# Altium PCB K60.PcbDoc
Units mil, origin at the board's own origin, x right, y up, seen from the top; angles counter-clockwise.
Board outline 3937.01 x 2480.32 mil, 2 copper layers (Top Layer, Bottom Layer); 44 components, 74 nets, 316 pads, 27 vias.
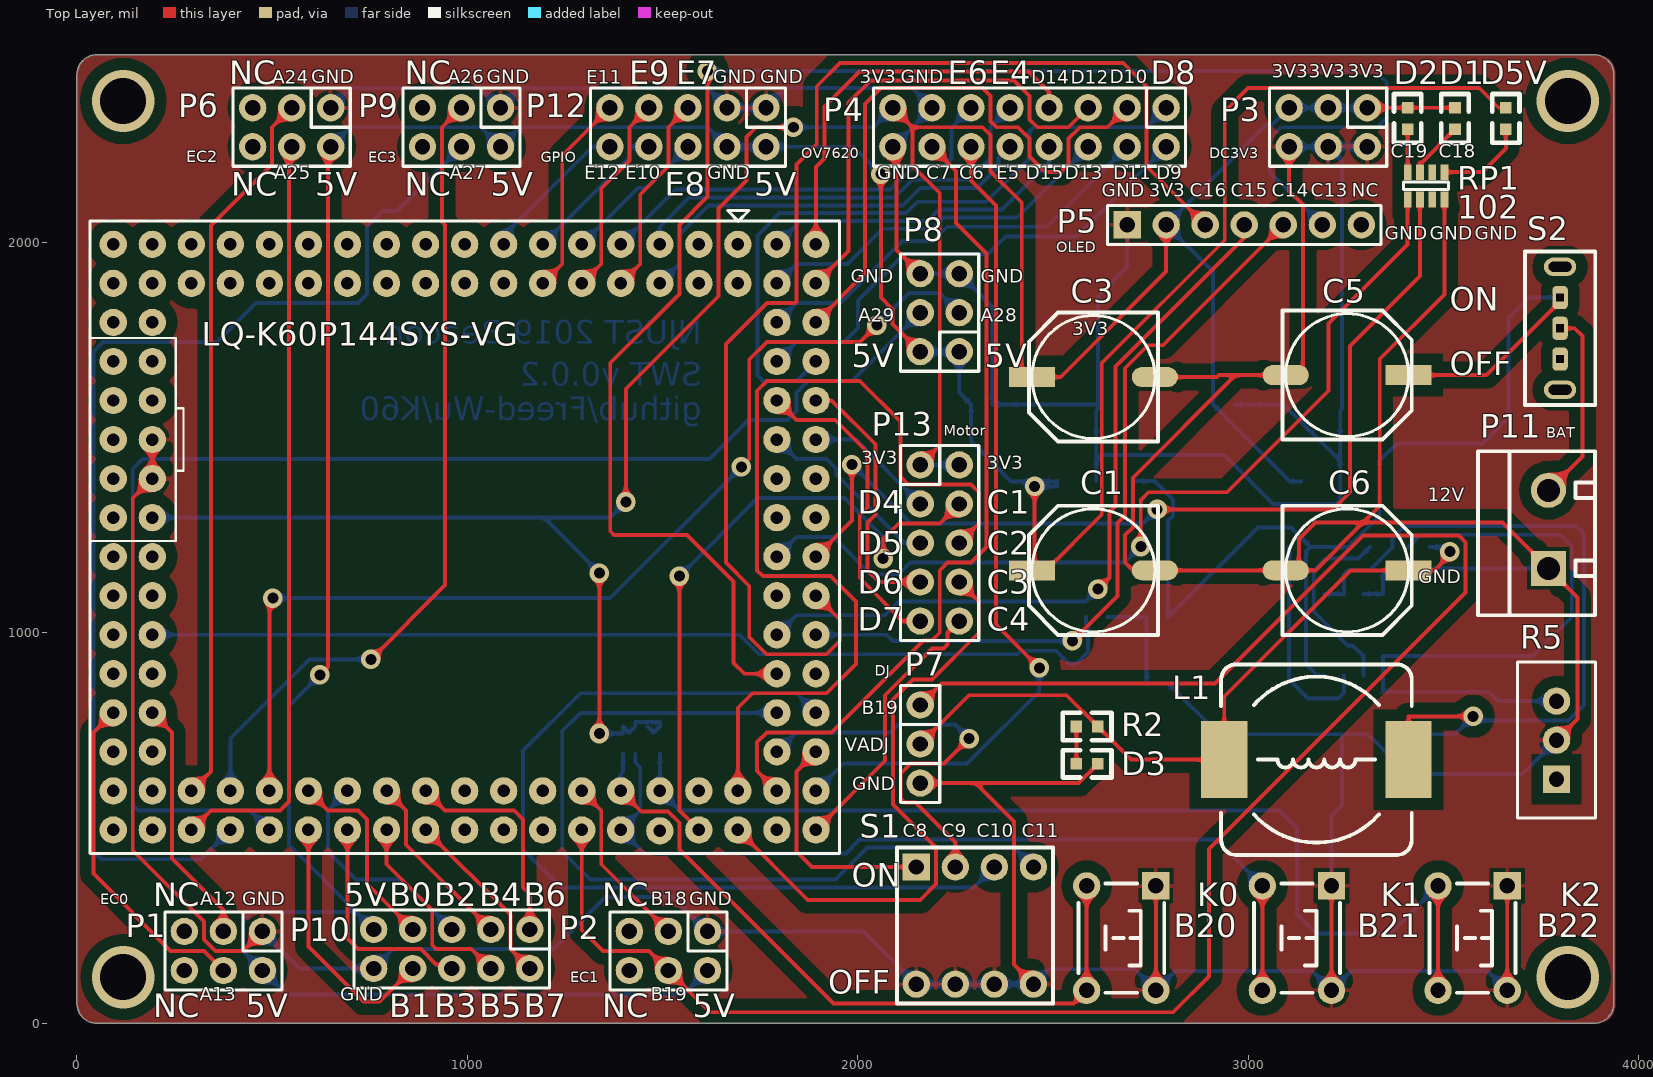
[diagram p0: Top Layer view]
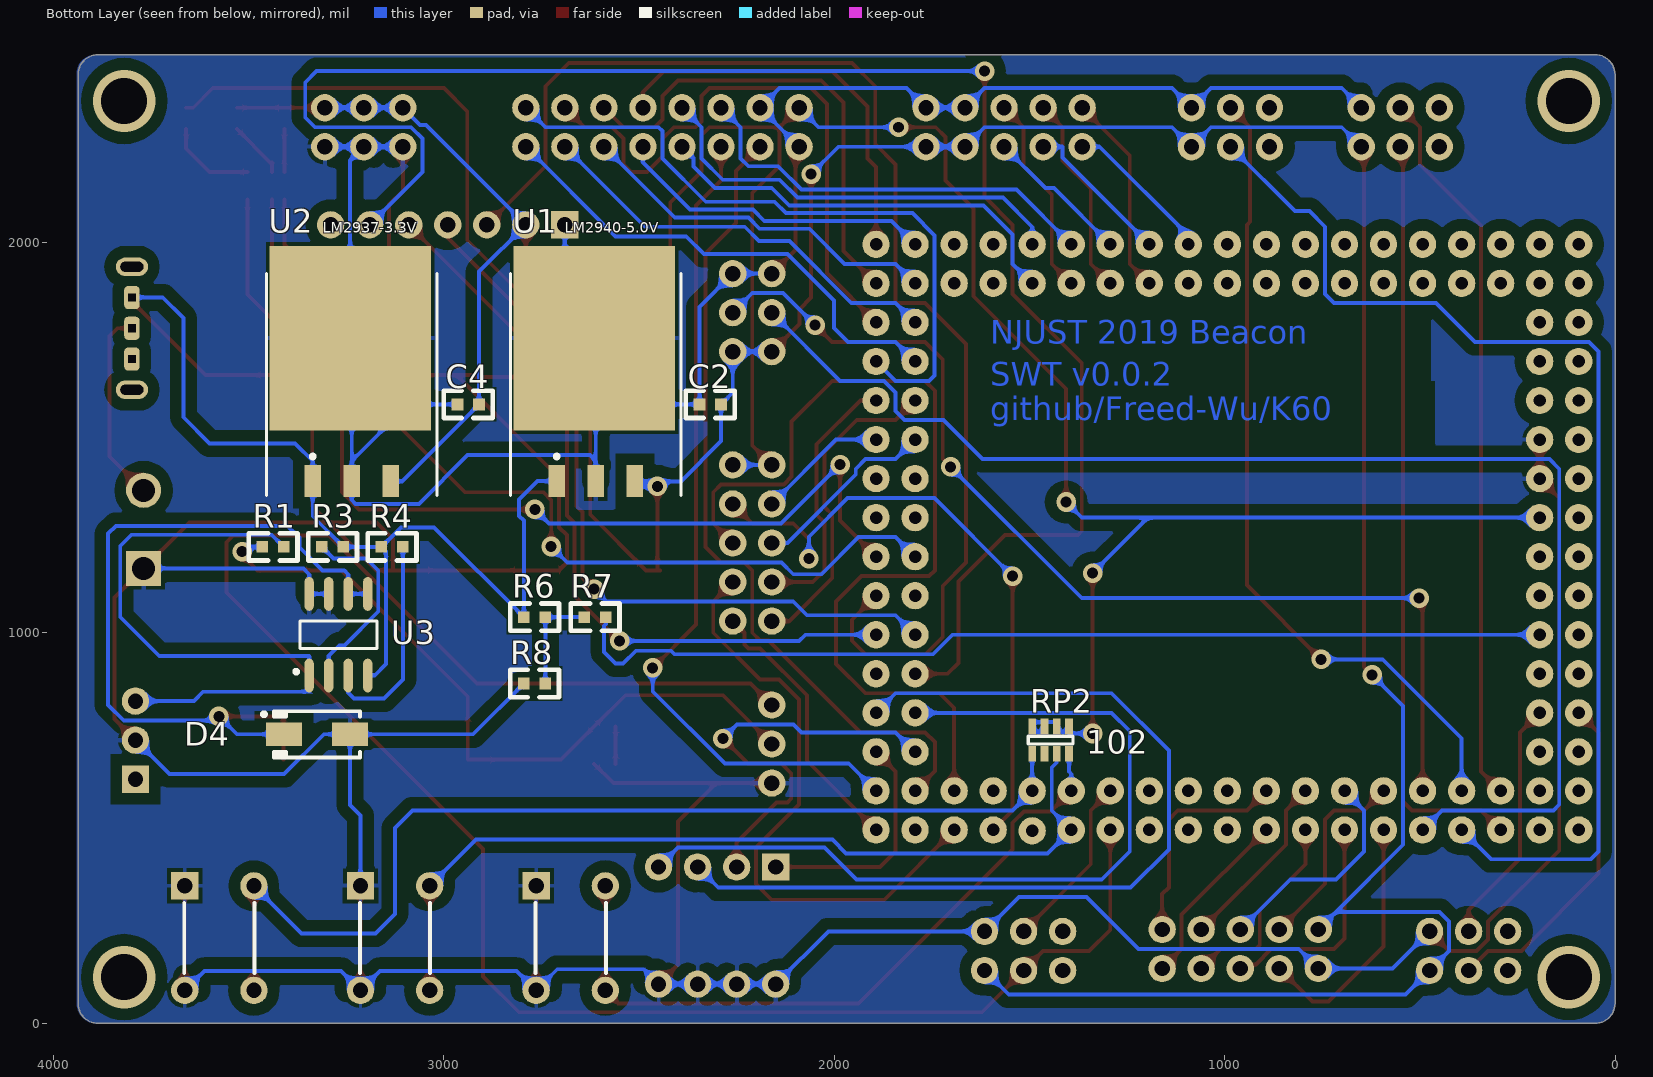
[diagram p1: Bottom Layer view, seen from below]
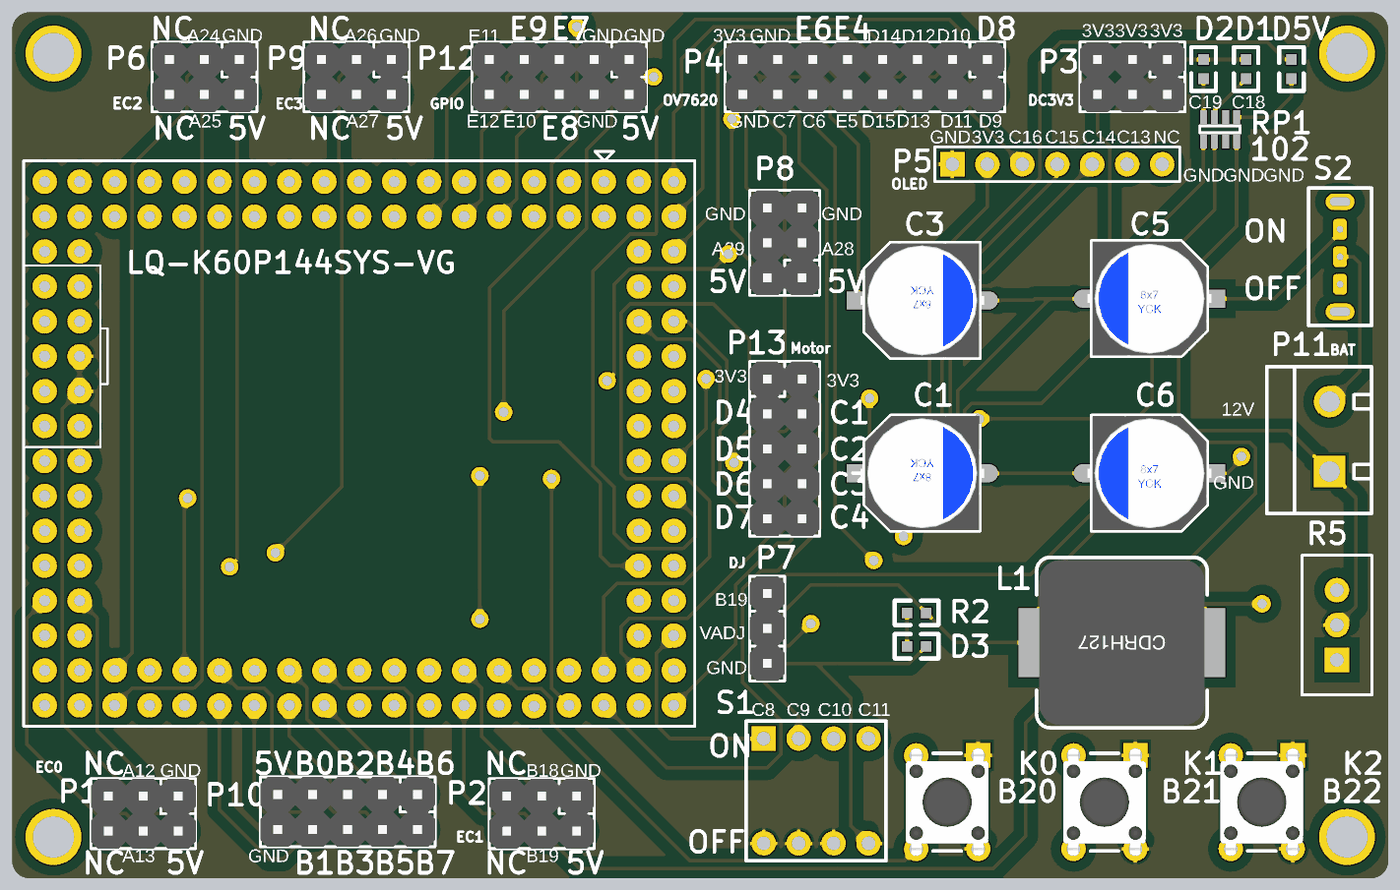
[diagram p2: 3D render of the assembled board from above, using the file's embedded part models]

## Layer stack, top to bottom
Top Solder: solder mask 0.4, Solder Resist, Dk 3.5
Top Layer: signal copper 1.4
Dielectric 1: dielectric 12.6, FR-4, Dk 4.8
Bottom Layer: signal copper 1.4
Bottom Solder: solder mask 0.4, Solder Resist, Dk 3.5

## Board outline
50,0 cw(c50,50) 0,50 0,118.11 0,2362.2 0,2430.31 cw(c50,2430.31) 50,2480.31 3887.01,2480.31 cw(c3887.01,2430.31) 3937.01,2430.31 3937.01,2362.2 3937.01,118.11 3937.01,50 cw(c3887.01,50) 3887.01,0

## Design rules (kind name [scope] priority, off if disabled: settings)
Clearance Clearance_1 [InPolygon] p1: gap=30 ignorepadtopadclearanceinfootprint=FALSE
Clearance [All] p2: gap=10 ignorepadtopadclearanceinfootprint=FALSE except(0: Arc-Hole Track-Hole SMDPad-Hole THPad-Hole Via-Hole Fill-Hole Poly-Hole Region-Hole Text-Hole)
PolygonConnect [All] p1: connectstyle=Relief reliefconductorwidth=10 reliefentries=4 polygonreliefangle="90 Angle" airgapwidth=10
RoutingVias [All] p1: holewidth=28 width=50 viastyle="Through Hole" minholewidth=28 minwidth=50 maxholewidth=28 maxwidth=50
SolderMaskExpansion [All] p1: expansion=4
Width [All] p1: maxlimit=10 minlimit=10 preferedwidth=10
30 further rules are at their usual default settings.

## Components (designator, comment, footprint, x,y, rotation, side; value= is the part's Value field where it differs from the comment)
C1 "Cap Pol1" "CT 8*7 - C" 2603.58,1160 r180 top value=470u/25V
C2 "Cap" 0603 2345,1585 r180 bottom value=104
C3 "Cap Pol1" "CT 8*7 - C" 2603.58,1655 r180 top value=470u/25V
C4 "Cap" 0603 2965,1585 r180 bottom value=104
C5 "Cap Pol1" "CT 8*7 - C" 3253.74,1660 r0 top value=220u
C6 "Cap Pol1" "CT 8*7 - C" 3253.74,1160 r0 top value=470u
D1 "发光二极管" 0603 3530,2345 r270 top
D2 "发光二极管" 0603 3408.5,2345 r270 top
D3 "发光二极管" 0603 2560,664.29 r0 top
D4 "IN5824" SMA 3325,740 r0 bottom
D5V "发光二极管" 0603 3660,2345 r270 top
K0 "B20" "TSW DIP-6*6*6" 2675,217.86 r270 top
K1 "B21" "TSW DIP-6*6*6" 3125,217.86 r270 top
K2 "B22" "TSW DIP-6*6*6" 3575,217.86 r270 top
L1 "Inductor" CDRH127 3175,675 r180 top value=33u
LQ-K60P144SYS-VG "" LQ_KXXP144-SYSVG 1692.91,1995 r180 top locked
P1 "EC0" 2.54排针2X3 475,235 r180 top locked
P2 "EC1" 2.54排针2X3 1615,235 r180 top locked
P3 "DC3V3" 2.54排针2X3 3305,2345 r180 top locked
P4 "OV7620" 2.54排针2X8 2390,2245 r180 top
P5 "OLED" HDR1X7 2690,2045 r0 top
P6 "EC2" 2.54排针2X3 650,2345 r180 top
P7 "DJ" 2.54排针1X3 2160,715 r90 top locked
P8 "ITR" 2.54排针2X3 2260,1720 r90 top
P9 "EC3" 2.54排针2X3 1085,2345 r180 top
P10 "ADC" 2.54排针2X5 1160,240 r180 top
P11 "BAT" KF301-2P 3768.94,1165 r90 top
P12 "GPIO" 2.54排针2X5 1765,2345 r180 top
P13 "Motor" 2.54排针2X5 2160,1430 r270 top
R1 "Res1" 0603 3410,1220 r0 bottom value=1K
R2 "Res1" 0603 2560,760 r0 top value=3K3
R3 "Res1" 0603 3257.5,1220 r0 bottom value=1K
R4 "Res1" 0603 3160,1220 r180 bottom value=2K7
R5 "Res Tap" VR_A1 3790,725 r90 top value=2K
R6 "Res1" 0603 2740,1040 r0 bottom value=2K
R7 "Res1" 0603 2585,1040 r0 bottom value=2K
R8 "Res1" 0603 2795,870 r180 bottom value=1K
RP1 "102" 8P4R_0603 3502.99,2180 r270 top
RP2 "102" 8P4R_0603 1492.99,690 r90 bottom
S1 "SW DIP-4" BMKG4 2300,250 r0 top
S2 "SW-SPDT" SW3-H2X3_8.6X4.5_L 3799.02,1740.63 r270 top
U1 "LM2940-5.0V" TO-263-3 2610.91,1555 r180 bottom
U2 "LM2937-3.3V" TO-263-3 3235.91,1555 r180 bottom
U3 "AS1015" NSO8_N 3270,995 r90 bottom

## Footprints (in the part's own frame and the unit in brackets; to place one, negate y for a bottom-side part, rotate by r counter-clockwise, add the part's x,y. Pads: shape width x height; smd on the part's side, far side on the other; paste and mask are expansions set on the pad)
2.54排针1X3 [mil]
  round 70 hole 39.37: 1(-100,0) 2(0,0) 3(100,0)
  silkscreen extent -150,-50 150,50, body extent -150,-50 150,50, height 98
2.54排针2X3 [mil]
  round 70 hole 39.37: 1(0,0) 2(0,100) 3(100,0) 4(100,100) 5(200,0) 6(200,100)
  silkscreen extent -50,-50 250,150, body extent -50,-50 250,150, height 98
2.54排针2X5 [mil]
  round 70 hole 39.37: 1(0,0) 2(0,100) 3(100,0) 4(100,100) 5(200,0) 6(200,100) 7(300,0) 8(300,100) 9(400,0) 10(400,100)
  silkscreen extent -50,-50 450,150, body extent -50,-50 450,150, height 98
2.54排针2X8 [mil]
  round 70 hole 39.37: 1(-400,-100) 2(-400,0) 3(-300,-100) 4(-300,0) 5(-200,-100) 6(-200,0) 7(-100,-100) 8(-100,0) 9(0,-100) 10(0,0) 11(100,-100) 12(100,0) 13(200,-100) 14(200,0) 15(300,-100) 16(300,0)
  silkscreen extent -450,-150 350,50, body extent -450,-150 350,50, height 98
8P4R_0603 [mm]
  rect 1.016x0.5 smd: 1(0,0) 2(1.778,0) 3(0,-0.8) 4(1.778,-0.8) 5(0,-1.6) 6(1.778,-1.6) 7(0,-2.4) 8(1.778,-2.4)
  silkscreen extent 0.63,-2.67 1.14,0.25, body extent 0,-2.67 1.78,0.25, height 1
0603 [mil]
  rect 30x30 smd: 1(0,0) 2(55,0)
  silkscreen extent -35,-35 90,35
BMKG4 [mil]
  round 70 hole 39.37: 1(-150,-150) 2(-50,-150) 3(50,-150) 4(150,-150) 5(150,150) 6(50,150) 7(-50,150)
  rect 70x70 hole 39.37: 8(-150,150)
  silkscreen extent -200,-200 200,200
CDRH127 [mm]
  rect 3x5 smd: 1(-6,0) 2(6,0)
  silkscreen extent -6.2,-6.2 6.2,6.2, body extent -6,-6 6,6, height 7.8
"CT 8*7 - C" [mm]
  rect 3x1.3 smd: 1(4,0)
  oval 3x1.3 smd: 2(-4,0)
  silkscreen extent -4.2,-4.2 4.2,4.2, body extent -4.5,-4.15 4.5,4.15, height 7
HDR1X7 [mil]
  rect 70x70 hole 39.37: 1(0,0)
  round 70 hole 39.37: 2(100,0) 3(200,0) 4(300,0) 5(400,0) 6(500,0) 7(600,0)
  silkscreen extent -50,-50 650,50
KF301-2P [mil]
  rect 90x90 hole 59.06: 1(0,0)
  round 90 hole 59.06: 2(200,0)
  silkscreen extent -120,-120 300,180, body extent -113,-118 300,181, height 396
LQ_KXXP144-SYSVG [mil]
  round 70 hole 32: 1(0,0) 2(0,100) 3(100,0) 4(100,100) 5(200,0) 6(200,100) 7(300,0) 8(300,100) 9(400,0) 10(400,100) 11(500,0) 12(500,100) 13(600,0) 14(600,100) 15(700,0) 16(700,100) 17(800,0) 18(800,100) 19(900,0) 20(900,100) 21(1000,0) 22(1000,100) 23(1100,0) 24(1100,100) 25(1200,0) 26(1200,100) 27(1300,0) 28(1300,100) 29(1400,0) 30(1400,100) 31(1500,0) 32(1600,0) 33(1500,100) 34(1600,100) 35(1500,200) 36(1600,200) 37(1500,300) 38(1600,300) 39(1500,400) 40(1600,400) 41(1500,500) 42(1600,500) 43(1500,600) 44(1600,600) 45(1500,700) 46(1600,700) 47(1500,800) 48(1600,800) 49(1500,900) 50(1600,900) 51(1500,1000) 52(1600,1000) 53(1500,1100) 54(1600,1100) 55(1500,1200) 56(1600,1200) 57(1500,1300) 58(1600,1300) 59(1500,1400) 60(1600,1400) 61(1500,1500) 62(1600,1500) 63(1400,1500) 64(1400,1400) 65(1300,1500) 66(1300,1400) 67(1200,1500) 68(1200,1400) 69(1100,1500) 70(1100,1400) 71(1000,1500) 72(1000,1400) 73(900,1500) 74(900,1400) 75(800,1500) 76(800,1400) 77(700,1500) 78(700,1400) 79(600,1500) 80(600,1400) 81(500,1500) 82(500,1400) 83(400,1500) 84(400,1400) 85(300,1500) 86(300,1400) 87(200,1502.36) 88(200,1400) 89(100,1500) 90(100,1400) 91(0,1500) 92(0,1400) 93(-100,1500) 94(-200,1500) 95(-100,1400) 96(-200,1400) 97(-100,1300) 98(-200,1300) 99(-100,1200) 100(-200,1200) 101(-100,1100) 102(-200,1100) 103(-100,1000) 104(-200,1000) 105(-100,900) 106(-200,900) 107(-100,800) 108(-200,800) 109(-100,700) 110(-200,700) 111(-100,600) 112(-200,600) 113(-100,500) 114(-200,500) 115(-100,400) 116(-200,400) 117(-100,300) 118(-200,300) 119(-100,200) 120(-200,200) 121(-100,100) 122(-200,100) 123(-100,0) 124(-200,0)
  silkscreen extent -260,-87 1660,1560
NSO8_N [mm]
  oval 2.2x0.6 smd: 1(-2.654,1.905) 2(-2.654,0.635) 3(-2.654,-0.635) 4(-2.654,-1.905) 5(2.654,-1.905) 6(2.654,-0.635) 7(2.654,0.635) 8(2.654,1.905)
  silkscreen extent -2.52,-2.5 0.9,2.88, body extent -1.95,-2.45 1.95,2.45, height 1.75
SMA [mm]
  rect 2.35x1.55 smd: 1(-2.15,0) 2(2.15,0)
  silkscreen extent -2.8,-1.5 3.58,1.5, body extent -2.6,-1.3 2.6,1.3, height 2.64
SW3-H2X3_8.6X4.5_L [mm]
  oval 1.2x2.1 hole 0.65 slot 1.5 at 90 deg: 0(-5,0) 0(3,0)
  rrect50% 1.5x1 hole 0.5 square: 1(-3,0) 2(-1,0) 3(1,0)
  silkscreen extent -6,-2.29 4,2.29, body extent -5.26,-2.23 3.23,2.21, height 8.91
TO-263-3 [mm]
  rect 1.05x2.1 smd: 1(-2.54,-4.225) 2(0,-4.225) 3(2.54,-4.225)
  rect 10.5x12 smd: 4(-0.104,5.08)
  silkscreen extent -5.55,-5.17 5.55,9.28, body extent -5.33,-4.7 5.33,9.27, height 1.6
"TSW DIP-6*6*6" [mm]
  rect 1.778x1.778 hole 1: 1(-3.4,2.25)
  round 1.778 hole 1: 2(-3.4,-2.25) 3(3.4,-2.25) 4(3.4,2.25)
  silkscreen extent -3.56,-2.79 3.56,2.79, body extent -4.11,-3 4.11,3, height 5.95
VR_A1 [mil]
  rect 70x70 hole 39.37: 1(-100,0)
  round 70 hole 39.37: 2(0,0) 3(100,0)
  silkscreen extent -200,-100 200,100, body extent -200,-100 200,100, height 413

## Part data
C1 C3 C5 C6: "Polarized Capacitor (Radial)", LatestRevisionDate=17-Jul-2002, LatestRevisionNote="Re-released for DXP Platform.", PackageDescription="Polarized Capacitor (Radial); 2 Leads", PackageReference=RB7.6-15, Published=8-Jun-2000, Publisher="Altium Limited"
C2 C4: "Capacitor", LatestRevisionDate=17-Jul-2002, LatestRevisionNote="Re-released for DXP Platform.", PackageDescription="Radial Cap, Thru-Hole; 2 Leads; 0.3 in Pin Spacing", PackageReference=RAD-0.3, Published=8-Jun-2000, Publisher="Altium Limited"
D4: library part Diode, "SS54", Code_JEDEC=DO-214-AB, LatestRevisionDate=17-Jul-2002, LatestRevisionNote="Re-released for DXP Platform.", PackageDescription="DO-214-AB/SMC; 2 C-Bend Leads; Body 7.9 x 5.9 mm, inc. leads (LxW)", PackageReference=SMC, PackageVersion=Sep-1996, Published=8-Jun-2000, Publisher="Altium Limited"
K0 K1 K2: library part key
LQ-K60P144SYS-VG: library part LQ_KXXP144-SYSVG
P1 P2 P3 P6 P8 P9: library part "Header 3X2", "Header, 3-Pin, Dual row", LatestRevisionDate=17-Jul-2002, LatestRevisionNote="Re-released for DXP Platform.", Publisher="Altium Limited"
P4: library part "Header 8X2", "Header, 8-Pin, Dual row", LatestRevisionDate=17-Jul-2002, LatestRevisionNote="Re-released for DXP Platform.", Publisher="Altium Limited"
P5: library part "Header 7", "Header, 7-Pin", LatestRevisionDate=17-Jul-2002, LatestRevisionNote="Re-released for DXP Platform.", Publisher="Altium Limited"
P7: library part "Header 3", "Header, 3-Pin", LatestRevisionDate=17-Jul-2002, LatestRevisionNote="Re-released for DXP Platform.", Publisher="Altium Limited"
P10 P12 P13: library part "Header 5X2", "Header, 5-Pin, Dual row", LatestRevisionDate=17-Jul-2002, LatestRevisionNote="Re-released for DXP Platform.", Publisher="Altium Limited"
P11: library part "Header 2", "Header, 2-Pin", LatestRevisionDate=17-Jul-2002, LatestRevisionNote="Re-released for DXP Platform.", Publisher="Altium Limited"
R1 R2 R3 R4 R6 R7 R8: "Resistor", LatestRevisionDate=17-Jul-2002, LatestRevisionNote="Re-released for DXP Platform.", PackageDescription="Axial Device, Thru-Hole; 2 Leads; 0.3 in Pin Spacing", PackageReference=AXIAL-0.3, Published=8-Jun-2000, Publisher="Altium Limited"
R5: "Tapped Resistor", LatestRevisionDate=17-Jul-2002, LatestRevisionNote="Re-released for DXP Platform.", PackageDescription="Variable Resistor, Thru-Hole; 3 Leads", PackageReference=VR3, Published=24-Mar-1999, Publisher="Altium Limited", Set Position=0.5, Sim Note="Enter the Resistance value and the set point into parameter fields."
RP1 RP2: library part "Res Pak-8"
S1: "DIP Switch, 4 Position, SPST", Code_IPC=SOIC127P600-8, Code_JEDEC=MS-012-AA, LatestRevisionDate=29-May-2009, LatestRevisionNote="IPC-7351 Footprint Added.", PackageDescription="8-Pin Small Outline Integrated Circuit 1.27 mm Pitch", PackageReference=SO8, PackageVersion=Dec-2002, Published=24-Mar-1999, Publisher="Altium Limited"
S2: "SPDT Subminiature Toggle Switch, Right Angle Mounting, Vertical Actuation", ComponentLink1Description="Manufacturer Link", ComponentLink1URL=http://www.apem.com, DatasheetVersion=05-Dec-2000, LatestRevisionDate=17-Dec-2003, LatestRevisionNote="Schematic revised, PCB Footprint replaced.", PackageDescription="Switch; 4 Leads", PackageReference=TL36WW15050, Published=24-Mar-1999, Publisher="Altium Limited"
U1 U2: library part LM2940, "5V稳压芯片"
U3: "可调升压芯片"
L1: Code_IEC=1005, Code_JEITA=0402, LatestRevisionDate=29-May-2009, LatestRevisionNote="IPC-7351 Footprint Added.", PackageDescription="Chip Inductor", PackageReference=0402-A, Published=8-Jun-2000, Publisher="Altium Limited"

## Via types
v1: diameter 50, hole 28, Top Layer to Bottom Layer, 23 vias
v2: diameter 160, hole 118.11, Top Layer to Bottom Layer, 4 vias

## Nets (pads, with @x,y where several pads share a name; then routed paths per layer and width w, separated by ;. In a path a pad name is that pad's centre, name@x,y a point inside that pad or via, vN(x,y) a via of type N, cw(c..) or ccw(c..) an arc to the next point about the centre after c; other vN are vias at no path point)
3V3: C3.1 C4.2 D1.1 D2.1 LQ-K60P144SYS-VG.45 P3.1 P3.3 P3.5 P4.15 P5.2 P13.1 P13.2 RP2.2 RP2.4 RP2.6 RP2.8 U2.3 | length 7793.9
  Top Layer w10: v1(1338,742) v1(1338,1153) ; v1(1406,1335) 1406,1625.09 1642.91,1862 1642.91,2086.91 1715,2159 1715,2270 1740,2295 v1(1835,2295) ; P4.15 2140,2295 ; P13.1 2210,1480 2210,2126 2140,2196 2140,2295 ; P5.2 2790,1925 2520,1655 C3.1 2420,1655 2420,2102 2340,2182 2340,2275 2320,2295 2140,2295 ; P3.1 D2.1 D1.1
  Bottom Layer w10: LQ-K60P144SYS-VG.45 1196,1295 ; v1(1338,742) 1398.5,742 RP2.8 1414.25,744.25 RP2.6 1430,771 1493,771 RP2.2 1477.24,744.25 RP2.4 ; v1(1338,1153) 1196,1295 ; v1(1406,1335) 1366,1295 1196,1295 ; v1(1835,2295) 2040,2295 P4.15 ; P13.1 P13.2 ; U2.3 3135.91,1388 3107,1388 C4.2 2910,1925 P5.2 3046,2301 3061,2301 P3.5 P3.3 P3.1
+5: C1.1 C2.2 D5V.1 P1.2 P2.2 P6.2 P8.1 P8.2 P9.2 P10.9 P12.2 P12.4 U1.3 | length 8852.1
  Top Layer w10: v1(622,892) 642.91,912.91 642.91,2237.91 P6.2 ; v1(2059,2175) 2059,1858.47 2089.01,1828.46 2089.01,1790.99 P8.2 ; C1.1 C1.1@2453,1160 ; v1(2453,1375) C1.1@2453,1160 ; D5V.1 3642,2345 3592,2395 3000,2395 2940,2335 2940,2005.57 2625,1690.57 2625,1303 2482,1160 C1.1@2453,1160
  Bottom Layer w10: v1(622,892) 542.91,812.91 542.91,457.09 715,285 ; P6.2 700,2295 1035,2295 P9.2 1135,2295 1615,2295 P12.4 P12.2 1989,2245 v1(2059,2175) ; P10.9 715,285 ; P2.2 1553,73 537,73 P1.2 425,185 425,260 450,285 715,285 ; P8.2 P8.1 2260,1615 C2.2 2290,1491 2393,1388 U1.3@2510.91,1388 ; v1(2453,1375) 2510.91,1375 U1.3@2510.91,1388 ; U1.3 U1.3@2510.91,1388
+12: P11.2 S2.2 | length 496.3
  Top Layer w10: P11.2 3856,1452.06 3856,1760 3836,1780 S2.2
BAT: C5.1 R3.1 R4.1 R6.2 S2.1 U1.1 U2.1 U3.4 | length 2879.2
  Top Layer w10: C5.1 3610.02,1660 3799.02,1849 S2.1
  Bottom Layer w10: U1.1 2760,1388.66 2807,1341.66 2807,1299.14 2795,1287.14 R6.2 3025,1270 3110,1270 R4.1 ; U3.4 3195,891 3177,891 3148,920 3148,1208 R4.1 ; S2.1 3799.02,1859 3720,1859 3667,1806 3667,1552 3600,1485 3380.91,1485 3335.91,1440 U2.1 3335.91,1298.41 R3.1 R4.1
GND: C1.2 C2.1 C3.2 C4.1 C5.2 C6.2 D3.2 D4.1 K0.1 K0.4 K1.1 K1.4 K2.1 K2.4 LQ-K60P144SYS-VG.41 LQ-K60P144SYS-VG.43 P1.1 P2.1 P3.2 P3.4 P3.6 P4.13 P4.16 P5.1 P6.1 P7.1 P8.5 P8.6 P9.1 P10.10 P11.1 P12.1 P12.3 R5.2 R8.1 RP1.2 S1.1 S1.2 S1.3 S1.4 U1.2 U1.4 U2.2 U2.4 U3.7 U3.8 | length 19160.9
  Top Layer w10: LQ-K60P144SYS-VG.41 LQ-K60P144SYS-VG.43 142.91,1345 142.91,442.09 325,260 325,214.29 354.29,185 425,185 P1.1 ; P4.16 2090,2215 2099.28,2215 2099.28,1980.72 P8.6 ; P7.1 2302,615 ; S1.4 2400,150 2400,517 2302,615 ; D3.2 2565.71,615 2302,615 ; C3.2 2920,1655 2925,1660 2968,1660 ; K0.4 K0.1 ; P3.6 3105,2132 3140,2097 3140,1660 C5.2 2968,1660 ; K1.4 K1.1 ; RP1.2 3502.99,1866.99 3337,1701 3337,1325 3294,1282 ; K2.4 K2.1 ; R5.2 3844,779 3844,1089.94 P11.1 3651.94,1282 3294,1282 ; 2968,1660 2705,1397 2705,1270 2685,1250 2685,1180 2705,1160 C1.2 C6.2 C6.2@3130,1160 ; C6.2@3130,1160 3130,1240 3172,1282 3294,1282 ; C6.2@3130,1160 3172,1160 3294,1282
  Bottom Layer w10: P1.1 570,140 P10.10 810,190 1221,190 1354,323 1527,323 P2.1 2015,235 S1.1 S1.2 S1.3 S1.4 2488,138 2709.58,138 K0.4 2813.58,134 3163.58,134 K1.4 3263.58,134 3613.58,134 K2.4 ; P6.1 700,2395 1035,2395 P9.1 1135,2395 1615,2395 P12.3 P12.1 1815,2395 2140,2395 P4.13 P4.16 ; P8.6 P8.5 2345,1835 C2.1 U1.4@2615,1585 ; U1.2 2610.91,1440 ; P5.1 2690,1937 2615,1862 U1.4 U1.4@2615,1585 ; R8.1 2925,740 D4.1 ; C4.1 3090.91,1585 3235.91,1440 ; P3.6 P3.4 ; K1.1 3213.58,532 3240.35,558.77 D4.1 ; U3.7 U3.8 3345,1150 3360,1165 P11.1 ; P3.2 P3.4 ; R5.2 3703,638 3409,638 3307,740 D4.1 ; 2610.91,1440 2610.91,1569 2615,1573.09 U1.4@2615,1585 ; 2610.91,1440 2625.91,1455 2939,1455 3064,1330 3225.91,1330 3235.91,1340 U2.2 3235.91,1440 ; P3.4 3240,2210 U2.4 3240,1573.09 3235.91,1569 3235.91,1440
NetD1_2: D1.2 RP1.5 | length 150.2
  Top Layer w10: RP1.5 3440,2205 3445,2205 D1.2
NetD2_2: D2.2 RP1.7 | length 110
  Top Layer w10: RP1.7 D2.2
NetD3_1: D3.1 R2.1 | length 95.7
  Top Layer w10: D3.1 R2.1
NetD4_2: D4.2 L1.1 U3.5 U3.6 | length 1995.1
  Top Layer w10: L1.1 3411.22,786 v1(3576,786)
  Bottom Layer w10: U3.5 U3.6 3245,1150 3255,1160 3311,1160 3370,1219 3370,1244 3400,1274 3840,1274 3860,1254 3860,815 3820,775 3587,775 v1(3576,786) 3530,740 D4.2
NetD5V_2: D5V.2 RP1.1 | length 231.9
  Top Layer w10: RP1.1 3600,2180 3660,2240 D5V.2
NetR1_1: R1.1 R5.3 U3.1 | length 1697.2
  Bottom Layer w10: R1.1 3441,1251 3800,1251 3829,1222 3829,1040 3729,940 3345,940 U3.1 3345,849 3616.47,849 3640.47,825 R5.3
NetR3_2: R3.2 U3.2 | length 499.1
  Bottom Layer w10: U3.2 3295,940 3268,967 3255,967 3168,1054 3168,1160 3198,1190 3282.5,1190 R3.2
NetR4_2: R4.2 U3.3 | length 549.6
  Bottom Layer w10: R4.2 3105,880 3153,832 3230,832 3245,847 U3.3
NetR6_1: R6.1 R7.2 R8.2 | length 270
  Bottom Layer w10: R7.2 R6.1 R8.2
PTA8: LQ-K60P144SYS-VG.51 R7.1 | length 2538.7
  Bottom Layer w10: LQ-K60P144SYS-VG.51 1697,995 1747,945 2409,945 2418,954 2508,954 2541,921 2560,921 2590,951 2590,1018 2585,1023 R7.1
PTA12: LQ-K60P144SYS-VG.55 P1.3 | length 635.4
  Top Layer w10: LQ-K60P144SYS-VG.55 242.91,745 242.91,422.13 375,290.04 P1.3
PTA13: LQ-K60P144SYS-VG.56 P1.4 | length 868.8
  Top Layer w10: LQ-K60P144SYS-VG.56 42,744.09 42,383 240,185 325,185 P1.4
PTA24: LQ-K60P144SYS-VG.64 P6.3 | length 1856.5
  Top Layer w10: LQ-K60P144SYS-VG.64 342.91,645 342.91,2042.91 500,2200 500,2295 P6.3
PTA25: LQ-K60P144SYS-VG.63 P6.4 | length 1960.2
  Top Layer w10: LQ-K60P144SYS-VG.63 342.91,545 520,545 542.91,567.91 542.91,2237.91 P6.4
PTA26: LQ-K60P144SYS-VG.66 P9.3 | length 2094.4
  Top Layer w10: v1(753,932) 942.91,1121.91 942.91,2045 935,2052.91 935,2295 P9.3
  Bottom Layer w10: LQ-K60P144SYS-VG.66 392.91,729.91 595,932 v1(753,932)
PTA27: LQ-K60P144SYS-VG.65 P9.4 | length 2931.5
  Bottom Layer w10: LQ-K60P144SYS-VG.65 317.91,420 62,420 42,440 42,1720 67,1745 359,1745 459,1845 720,1845 742.91,1867.91 742.91,2040 782.91,2080 820,2080 P9.4
PTA28: LQ-K60P144SYS-VG.68 P8.3 | length 2749.4
  Top Layer w10: LQ-K60P144SYS-VG.68 492.91,1079.91 v1(502,1089) ; v1(1702,1425) 1722,1445 1722,1700 1767,1745 2006,1745 v1(2049,1788)
  Bottom Layer w10: v1(502,1089) 1366,1089 v1(1702,1425) ; v1(2049,1788) 2131,1870 2210,1870 P8.3
PTA29: LQ-K60P144SYS-VG.67 P8.4 | length 3447.7
  Bottom Layer w10: LQ-K60P144SYS-VG.67 442.91,545 157.91,545 142.91,560 142.91,1420 167.91,1445 1620,1445 1720,1545 1820,1545 1842.91,1567.91 1842.91,1615.71 1872.2,1645 1985,1645 P8.4
PTB0: LQ-K60P144SYS-VG.70 P10.7 | length 510.8
  Top Layer w10: LQ-K60P144SYS-VG.70 642.91,545 720,545 742.91,522.09 742.91,357.09 P10.7
PTB1: LQ-K60P144SYS-VG.69 P10.8 | length 659.6
  Top Layer w10: LQ-K60P144SYS-VG.69 592.91,196.09 734,55 775,55 P10.8
PTB2: LQ-K60P144SYS-VG.72 P10.5 | length 575.6
  Bottom Layer w10: LQ-K60P144SYS-VG.72 642.91,545 642.91,440 714.91,368 832,368 P10.5
PTB3: LQ-K60P144SYS-VG.71 P10.6 | length 573.9
  Top Layer w10: LQ-K60P144SYS-VG.71 692.91,217.09 720,190 880.71,190 920,150.71 P10.6
PTB4: LQ-K60P144SYS-VG.74 P10.3 | length 465.6
  Top Layer w10: LQ-K60P144SYS-VG.74 842.91,545 842.91,457.09 P10.3
PTB5: LQ-K60P144SYS-VG.73 P10.4 | length 518.4
  Top Layer w10: LQ-K60P144SYS-VG.73 792.91,407.09 910,290 910,200 920,190 1010,190 P10.4
PTB6: LQ-K60P144SYS-VG.76 P10.1 | length 569.4
  Top Layer w10: LQ-K60P144SYS-VG.76 942.91,545 1120,545 1142.91,522.09 1142.91,348 1160,330.91 P10.1
PTB7: LQ-K60P144SYS-VG.75 P10.2 | length 465.6
  Top Layer w10: LQ-K60P144SYS-VG.75 1110,277.91 1110,190 P10.2
PTB18: LQ-K60P144SYS-VG.84 P2.3 | length 452
  Top Layer w10: LQ-K60P144SYS-VG.84 1342.91,545 1342.91,407.09 P2.3
PTB19: LQ-K60P144SYS-VG.83 P2.4 P7.3 | length 4956.5
  Top Layer w10: LQ-K60P144SYS-VG.83 1292.91,239.09 1347,185 1465,185 P2.4 1622,28 2808,28 2900,120 2900,446 3557,1103 3557,1232 3540,1249 3294,1249 2915,870 2215,870 P7.3
PTB20: K0.2 K0.3 LQ-K60P144SYS-VG.86 RP2.7 | length 1838.4
  Top Layer w10: LQ-K60P144SYS-VG.86 1445.28,542.64 1513.63,542.64 1542.91,513.35 1542.91,445 1937.91,50 2552.42,50 K0.3 K0.2
  Bottom Layer w10: LQ-K60P144SYS-VG.86 1392.91,639 1398.5,644.59 RP2.7
PTB21: K1.2 K1.3 LQ-K60P144SYS-VG.85 RP2.5 | length 2220.9
  Top Layer w10: K1.3 K1.2
  Bottom Layer w10: RP2.5 1430,667.91 1442.91,655 1442.91,545 LQ-K60P144SYS-VG.85 1453.27,434.64 1969.56,434.64 2004.92,470 2918.13,470 K1.2
PTB22: K2.2 K2.3 LQ-K60P144SYS-VG.88 RP2.1 | length 2686.7
  Top Layer w10: K2.3 K2.2
  Bottom Layer w10: RP2.1 1492.99,642.08 1492.91,642 LQ-K60P144SYS-VG.88 1542.91,545 3080,545 3125,500 3125,280 3175,230 3364.7,230 K2.2
PTC1: LQ-K60P144SYS-VG.89 P13.4 | length 1654.9
  Top Layer w10: v1(1542.91,1144.91) 1542.91,545 LQ-K60P144SYS-VG.89 ; v1(2065,1190) 2065,1240 2105,1280 2210,1280 P13.4
  Bottom Layer w10: v1(1542.91,1144.91) 1743,1345 1966,1345 2065,1246 v1(2065,1190)
PTC2: LQ-K60P144SYS-VG.92 P13.6 | length 2397.3
  Top Layer w10: LQ-K60P144SYS-VG.92 1692.91,807.91 1730,845 1920,845 1995,920 1995,1080 1930,1145 1757,1145 1742,1160 1742,1620 1767,1645 2005,1645 2109,1541 2109,1400 2129,1380 2290,1380 2310,1360 2310,1280 P13.6
PTC3: LQ-K60P144SYS-VG.91 P13.8 | length 1557.9
  Top Layer w10: LQ-K60P144SYS-VG.91 1871.91,316 2160,316 2200,356 2200,450 2090,560 2090,829 2141.38,880.38 2190.38,880.38 2310,1000 2310,1080 P13.8
PTC4: LQ-K60P144SYS-VG.94 P13.10 | length 704.6
  Top Layer w10: LQ-K60P144SYS-VG.94 2070,672.09 2070,840 2190,960 2220,960 2230,970 2230,1000 P13.10
PTC6: LQ-K60P144SYS-VG.96 P4.12 | length 2145.2
  Top Layer w10: P4.12 2290,2159 2354,2095 2354,1021 v1(2465,910)
  Bottom Layer w10: LQ-K60P144SYS-VG.96 1962.91,665 2280,665 2465,850 v1(2465,910)
PTC7: LQ-K60P144SYS-VG.95 P4.14 | length 2117.9
  Top Layer w10: LQ-K60P144SYS-VG.95 1742,645.91 1742,720 1767,745 1933,745 2168,980 2190,980 2210,1000 2210,1160 2230,1180 2290,1180 2330,1220 2330,1972 2252,2050 2252,2183 P4.14
PTC8: LQ-K60P144SYS-VG.98 S1.8 | length 599.4
  Top Layer w10: LQ-K60P144SYS-VG.98 1842.91,645 1842.91,440 1882.91,400 S1.8
PTC9: LQ-K60P144SYS-VG.97 S1.7 | length 1062.2
  Top Layer w10: S1.7 2250,463 2148,565 2120,565 2110,575 2110,640 2135,665 2221,665 v1(2285,729)
  Bottom Layer w10: LQ-K60P144SYS-VG.97 1842.91,745 2084,745 2104,765 2249,765 v1(2285,729)
PTC10: LQ-K60P144SYS-VG.100 S1.6 | length 2354.2
  Bottom Layer w10: LQ-K60P144SYS-VG.100 1842.91,845 1289.91,845 1142.91,698 1142.91,445 1240.91,347 2297,347 S1.6
PTC11: LQ-K60P144SYS-VG.99 S1.5 | length 2169
  Bottom Layer w10: LQ-K60P144SYS-VG.99 1289.91,795 1242.91,748 1242.91,440 1314.83,368.08 1943.08,368.08 2025,450 2400,450 S1.5
PTC13: LQ-K60P144SYS-VG.101 P5.6 | length 4423.4
  Top Layer w10: v1(1615,2439) 1615,2117.09 1542.91,2045 1542.91,1867.91 1366,1691 1366,1260 1376,1250 1563,1250 1682,1131 1682,923 1710,895 LQ-K60P144SYS-VG.101
  Bottom Layer w10: v1(1615,2439) 3326,2439 3355,2410 3355,2320 3330,2295 3084,2295 3055,2266 3055,2180 P5.6
PTC14: LQ-K60P144SYS-VG.104 P5.5 | length 1975.7
  Top Layer w10: v1(2550,979) 2665,1094 2665,1281 2684.55,1300.55 2684.55,1677.69 2743.35,1736.49 2781.49,1736.49 P5.5
  Bottom Layer w10: LQ-K60P144SYS-VG.104 2074,995 2090,979 v1(2550,979)
PTC15: LQ-K60P144SYS-VG.103 P5.4 | length 1958
  Top Layer w10: v1(2615,1112) 2645,1142 2645,1309 2660,1324 2660,1682 2987.78,2009.78 P5.4
  Bottom Layer w10: LQ-K60P144SYS-VG.103 1842.91,1045 2070,1045 2105,1080 2583,1080 v1(2615,1112)
PTC16: LQ-K60P144SYS-VG.106 P5.3 | length 3292.9
  Top Layer w10: LQ-K60P144SYS-VG.106 1954.5,1033.41 1954.5,979.5 1920,945 1766,945 1722,989 1722,1120 1662,1180 1662,1740 1767,1845 1839.91,1845 1842.91,1848 1842.91,2200 1895,2252.09 1895,2400 1955,2460 2680,2460 2740,2400 2740,2195 P5.3
PTC18: LQ-K60P144SYS-VG.108 RP1.6 | length 2470
  Top Layer w10: LQ-K60P144SYS-VG.108 1985,1287.09 v1(1985,1431) ; v1(2767,1316) 3217,1316 3261,1360 3261,1735 3440,1914 RP1.6
  Bottom Layer w10: v1(1985,1431) 2136,1280 2731,1280 v1(2767,1316)
PTC19: LQ-K60P144SYS-VG.107 RP1.8 | length 2311.4
  Top Layer w10: v1(2725,1221) 2725,1340 2745,1360 2946,1360 3206,1620 3206,1792.5 3408.5,1995 RP1.8
  Bottom Layer w10: LQ-K60P144SYS-VG.107 1842.91,1245 1937.95,1245 2032.95,1150 2105,1150 2135,1180 2684,1180 v1(2725,1221)
PTD4: LQ-K60P144SYS-VG.114 P13.3 | length 335.4
  Bottom Layer w10: LQ-K60P144SYS-VG.114 1995,1495 P13.3
PTD5: LQ-K60P144SYS-VG.113 P13.5 | length 485.6
  Bottom Layer w10: LQ-K60P144SYS-VG.113 1842.91,1445 1920,1445 1945,1420 1945,1405 2120,1230 P13.5
PTD6: LQ-K60P144SYS-VG.116 P13.7 | length 677.1
  Top Layer w10: LQ-K60P144SYS-VG.116 1932.91,1595 2045,1482.91 2045,1302.32 2025,1282.32 2025,1160 2055,1130 P13.7
PTD7: LQ-K60P144SYS-VG.115 P13.9 | length 818.2
  Top Layer w10: LQ-K60P144SYS-VG.115 1842.91,1545 1942.36,1545 2025,1462.36 2025,1322.32 2005,1302.32 2005,1140 2115,1030 P13.9
PTD8: LQ-K60P144SYS-VG.118 P4.1 | length 1758.9
  Bottom Layer w10: LQ-K60P144SYS-VG.118 1842.91,1645 1757,1645 1742.91,1659.09 1742.91,2017.91 1800,2075 2123.54,2075 2152.54,2104 2329,2104 2440,2215 2440,2285 2450,2295 2740,2295 P4.1
PTD9: LQ-K60P144SYS-VG.117 P4.2 | length 1265.9
  Bottom Layer w10: LQ-K60P144SYS-VG.117 1842.91,1745 1965,1745 2000.85,1780.85 2000.85,1850.85 2120,1970 2334,1970 2379,2015 2560,2015 P4.2
PTD10: LQ-K60P144SYS-VG.120 P4.3 | length 1560
  Top Layer w10: LQ-K60P144SYS-VG.120 2019,1921.09 2019,2354 2060,2395 2320,2395 2340,2375 2340,2310 2355,2295 2410.71,2295 2440,2265.71 2440,2220 2480,2180 2520,2180 2540,2200 2540,2265.71 2569.29,2295 2640,2295 P4.3
PTD11: LQ-K60P144SYS-VG.119 P4.4 | length 1083.5
  Bottom Layer w10: LQ-K60P144SYS-VG.119 1842.91,1845 1956.31,1845 2114.63,2003.32 2192.6,2003.32 2229.28,2040 2485,2040 P4.4
PTD12: LQ-K60P144SYS-VG.122 P4.5 | length 1240.5
  Top Layer w10: LQ-K60P144SYS-VG.122 1976,1978.09 1976,2357.83 2033.17,2415 2400,2415 2440,2375 2440,2315 2460,2295 2540,2295 P4.5
PTD13: LQ-K60P144SYS-VG.121 P4.6 | length 942.1
  Bottom Layer w10: LQ-K60P144SYS-VG.121 1842.91,1945 1973.81,1945 2063.81,2035 2191.46,2035 2220,2063.54 2408.54,2063.54 P4.6
PTD14: LQ-K60P144SYS-VG.124 P4.7 | length 1036.7
  Top Layer w10: LQ-K60P144SYS-VG.124 1892.91,2192.91 1915,2215 1915,2348.46 2004.54,2438 2437,2438 2490,2385 P4.7
PTD15: LQ-K60P144SYS-VG.123 P4.8 | length 824.1
  Bottom Layer w10: LQ-K60P144SYS-VG.123 1852.91,2055 2179.28,2055 2208.28,2084 2369,2084 2490,2205 P4.8
PTE4: LQ-K60P144SYS-VG.5 P4.9 | length 1115.3
  Bottom Layer w10: LQ-K60P144SYS-VG.5 1492.91,2040 1567.91,2115 2094.28,2115 2139.78,2160.5 2285.5,2160.5 2340,2215 2340,2295 P4.9
PTE5: LQ-K60P144SYS-VG.6 P4.10 | length 1098.4
  Bottom Layer w10: LQ-K60P144SYS-VG.6 1542.91,1945 1542.91,2020.63 1617.28,2095 2115.26,2095 2160,2139.74 2305.36,2139.74 2360,2194.38 2360,2215 P4.10
PTE6: LQ-K60P144SYS-VG.7 P4.11 | length 1088.9
  Bottom Layer w10: LQ-K60P144SYS-VG.7 1532.91,2135 2084.28,2135 2144.28,2195 2220,2195 2240,2215 2240,2295 P4.11
PTE7: LQ-K60P144SYS-VG.8 P12.5 | length 521.3
  Top Layer w10: LQ-K60P144SYS-VG.8 1442.91,1945 1442.91,2122.91 1515,2195 1515,2295 P12.5
PTE8: LQ-K60P144SYS-VG.9 P12.6 | length 375.6
  Bottom Layer w10: LQ-K60P144SYS-VG.9 1436.91,2139 1459,2139 P12.6
PTE9: LQ-K60P144SYS-VG.10 P12.7 | length 521.3
  Top Layer w10: LQ-K60P144SYS-VG.10 1342.91,1945 1342.91,2137.91 1415,2210 1415,2295 P12.7
PTE10: LQ-K60P144SYS-VG.11 P12.8 | length 392
  Bottom Layer w10: LQ-K60P144SYS-VG.11 1415,2217.09 1415,2245 P12.8
PTE11: LQ-K60P144SYS-VG.12 P12.9 | length 521.3
  Top Layer w10: LQ-K60P144SYS-VG.12 1242.91,1945 1242.91,2222.91 P12.9
PTE12: LQ-K60P144SYS-VG.13 P12.10 | length 389.1
  Bottom Layer w10: LQ-K60P144SYS-VG.13 1092.91,2017.91 1320,2245 P12.10
VADJ: C6.1 L1.2 P7.2 R1.2 R2.2 | length 1854.3
  Top Layer w10: P7.2 2285,840 2535,840 R2.2 2700,675 L1.2 2938.78,836.78 3262,1160 C6.1 3477,1160 3517,1200 v1(3517,1208)
  Bottom Layer w10: R1.2 3505,1220 v1(3517,1208)
pads on no net: LQ-K60P144SYS-VG.1 LQ-K60P144SYS-VG.2 LQ-K60P144SYS-VG.3 LQ-K60P144SYS-VG.4 LQ-K60P144SYS-VG.14 LQ-K60P144SYS-VG.15 LQ-K60P144SYS-VG.16 LQ-K60P144SYS-VG.17 LQ-K60P144SYS-VG.18 LQ-K60P144SYS-VG.19 LQ-K60P144SYS-VG.20 LQ-K60P144SYS-VG.21 LQ-K60P144SYS-VG.22 LQ-K60P144SYS-VG.23 LQ-K60P144SYS-VG.24 LQ-K60P144SYS-VG.25 LQ-K60P144SYS-VG.26 LQ-K60P144SYS-VG.27 LQ-K60P144SYS-VG.28 LQ-K60P144SYS-VG.29 LQ-K60P144SYS-VG.30 LQ-K60P144SYS-VG.31 LQ-K60P144SYS-VG.32 LQ-K60P144SYS-VG.33 LQ-K60P144SYS-VG.34 LQ-K60P144SYS-VG.35 LQ-K60P144SYS-VG.36 LQ-K60P144SYS-VG.37 LQ-K60P144SYS-VG.38 LQ-K60P144SYS-VG.39 LQ-K60P144SYS-VG.40 LQ-K60P144SYS-VG.42 LQ-K60P144SYS-VG.44 LQ-K60P144SYS-VG.46 LQ-K60P144SYS-VG.47 LQ-K60P144SYS-VG.48 LQ-K60P144SYS-VG.49 LQ-K60P144SYS-VG.50 LQ-K60P144SYS-VG.52 LQ-K60P144SYS-VG.53 LQ-K60P144SYS-VG.54 LQ-K60P144SYS-VG.57 LQ-K60P144SYS-VG.58 LQ-K60P144SYS-VG.59 LQ-K60P144SYS-VG.60 LQ-K60P144SYS-VG.61 LQ-K60P144SYS-VG.62 LQ-K60P144SYS-VG.77 LQ-K60P144SYS-VG.78 LQ-K60P144SYS-VG.79 LQ-K60P144SYS-VG.80 LQ-K60P144SYS-VG.81 LQ-K60P144SYS-VG.82 LQ-K60P144SYS-VG.87 LQ-K60P144SYS-VG.90 LQ-K60P144SYS-VG.93 LQ-K60P144SYS-VG.102 LQ-K60P144SYS-VG.105 LQ-K60P144SYS-VG.109 LQ-K60P144SYS-VG.110 LQ-K60P144SYS-VG.111 LQ-K60P144SYS-VG.112 P1.5 P1.6 P2.5 P2.6 P5.7 P6.5 P6.6 P9.5 P9.6 R5.1 RP1.3 RP1.4 RP2.3 S2.0 S2.3
copper on no net:
  other v2: 118.11,118.11 3818.9,118.11 118.11,2362.2 3818.9,2362.2

## Polygon pours and split planes (outlines as drawn)
GND on Top Overlay (solid, remove dead copper): 3895,2480 cw(c3895,2440) 3935,2440 3935,45 cw(c3890,45) 3890,0 50,0 cw(c50,50) 0,50 0,2430 cw(c50,2430) 50,2480
no net on Top Overlay (solid): 3550,2485
no net on Top Overlay (solid): 130,2485
no net on Mechanical 1 (solid): 45,2440
GND on Top Layer "Top Layer-GND" (solid, remove dead copper, pour order 16): 50,2480 3895,2480 cw(c3895,2435) 3940,2435 3940,45 cw(c3895,45) 3895,0 50,0 cw(c50,50) 0,50 0,2430 cw(c50,2430)
GND on Bottom Layer "Bottom Layer-GND" (solid, remove dead copper, pour order 18): 49.72,2479.31 3894.72,2479.31 cw(c3894.72,2434.31) 3939.72,2434.31 3939.72,49.31 cw(c3889.72,49.31) 3889.72,-0.69 49.72,-0.69 cw(c49.72,49.31) -0.28,49.31 -0.28,2429.31 cw(c49.72,2429.31)

## Other copper
Bottom Layer:
  pour cut-out: 1618.9,1820 1618.9,1505 471.1,1505 471.1,1820
  pour cut-out: 1745,1469.85
  text "NJUST 2019 Beacon" at 1600,1740 h60
  text "SWT v0.0.2" at 1600,1632.5 h60
  text "github/Freed-Wu/K60" at 1600,1545 h60

## Silkscreen, mask and mechanical layers (free items; w line width, h text height)
Top Overlay:
  text "3V3" at 3060,2410 h60
  text "3V3" at 3155,2410 h60
  text "3V3" at 3255,2410 h60
  text "NC" at 390,2405 h60
  text "NC" at 840,2405 h60
  text "E9" at 1415,2405 h60
  text "E7" at 1535,2405 h60
  text "E6" at 2230,2405 h60
  text "E4" at 2340,2405 h60
  text "D8" at 2750,2405 h60
  text "GND" at 600,2395.67 h60
  text "A26" at 950,2395.67 h60
  text "GND" at 1050,2395.67 h60
  text "GND" at 1630,2395.67 h60
  text "GND" at 1750,2395.67 h60
  text "3V3" at 2005,2395.67 h60
  text "GND" at 2110,2395.67 h60
  text "D10" at 2645,2395.67 h60
  text "A24" at 500,2395 h60
  text "E11" at 1305,2395 h60
  text "D14" at 2445,2395 h60
  text "D12" at 2545,2395 h60
  text "C19" at 3365,2205 h60
  text "C18" at 3488.5,2205 h60
  text "E5" at 2355,2150.67 h60
  text "A25" at 505,2150.5 h60
  text "A27" at 955,2150.5 h60
  text "E12" at 1300,2150.5 h60
  text "E10" at 1405,2150.5 h60
  text "GND" at 1615,2150 h60
  text "GND" at 2050,2150 h60
  text "C7" at 2175,2150 h60
  text "C6" at 2260,2150 h60
  text "D15" at 2430,2150.5 h60
  text "D13" at 2530,2150.5 h60
  text "D11" at 2655,2150.5 h60
  text "D9" at 2765,2150.5 h60
  text "NC" at 395,2119.09 h60
  text "5V" at 610,2119.09 h60
  text "NC" at 840,2119.09 h60
  text "5V" at 1060,2119.09 h60
  text "E8" at 1505,2119.09 h60
  text "5V" at 1735,2119.09 h60
  text "GND" at 2625,2105 h60
  text "3V3" at 2745,2105 h60
  text "C16" at 2850.35,2105 h60
  text "C15" at 2955,2105 h60
  text "C14" at 3060,2105 h60
  text "C13" at 3160,2105 h60
  text "NC" at 3265,2105 h60
  text "GND" at 3350,1995.67 h60
  text "GND" at 3465,1995.67 h60
  text "GND" at 3580,1995.67 h60
  text "GND" at 1981.41,1885 h60
  text "GND" at 2315,1885 h60
  text "ON" at 3516.22,1825 h60
  text "A29" at 2001.78,1785 h60
  text "A28" at 2315,1785 h60
  text "3V3" at 2550,1750 h60
  text "5V" at 1985,1680 h60
  text "5V" at 2325,1680 h60
  text "OFF" at 3516.22,1660 h60
  text "3V3" at 2008.4,1420 h60
  text "3V3" at 2330,1407.91 h60
  text "12V" at 3460,1325 h60
  text "D4" at 2000,1305 h60
  text "C1" at 2330,1305 h60
  text "D5" at 2000,1200 h60
  text "C2" at 2330,1200 h60
  text "GND" at 3435.69,1115 h60
  text "D6" at 2000,1100 h60
  text "C3" at 2330,1100 h60
  text "D7" at 2000,1005 h60
  text "C4" at 2330,1005 h60
  text "B19" at 2010.01,780 h60
  text "VADJ" at 1966.39,685 h60
  text "GND" at 1985.65,585 h60
  text "C8" at 2115,465 h60
  text "C9" at 2215,465 h60
  text "C10" at 2305,465 h60
  text "C11" at 2420,465 h60
  text "ON" at 1984.98,350 h60
  text "NC" at 195,300 h60
  text "5V" at 684.98,300 h60
  text "B0" at 800,300 h60
  text "B2" at 915,300 h60
  text "B4" at 1030,300 h60
  text "B6" at 1145,300 h60
  text "NC" at 1345,300 h60
  text "GND" at 422.91,290.67 h60
  text "B18" at 1470,290.67 h60
  text "GND" at 1567.91,290.67 h60
  text "A12" at 315.39,290 h60
  text "OFF" at 1925,75 h60
  text "A13" at 315,46.41 h60
  text "GND" at 674.98,45.91 h60
  text "B19" at 1470,46.41 h60
  text "NC" at 195,15 h60
  text "5V" at 432.91,15 h60
  text "B1" at 800,15 h60
  text "B3" at 915,15 h60
  text "B5" at 1030,15 h60
  text "B7" at 1145,15 h60
  text "NC" at 1345,15 h60
  text "5V" at 1577.91,15 h60
Bottom Overlay:
Mechanical 1:
  lines w10: 3885,0 50,0 cw(c50,50) 0,50 0,2430.31 cw(c50,2430.31) 50,2480.31 3887.01,2480.31 cw(c3887.01,2430.31) 3937.01,2430.31 3937.01,50 cw(c3887.01,50) 3887.01,0

## Text inside footprints (layer, text, board x,y; h text height)
S1: Mechanical 11 "8" at 2140,400 h25; Mechanical 11 "7" at 2240,400 h25; Mechanical 11 "6" at 2340,400 h25; Mechanical 11 "5" at 2440,400 h25; Mechanical 11 "2" at 2240,100 h25; Mechanical 11 "1" at 2140,100 h25; Mechanical 11 "4" at 2440,100 h25; Mechanical 11 "3" at 2340,100 h25